# Altium PCB PCB1.PcbDoc
Units mil, origin at the board's own origin, x right, y up, seen from the top; angles counter-clockwise.
Board outline 2190 x 1760 mil, 2 copper layers (Top Layer, Bottom Layer); 13 components, 6 nets, 30 pads, 0 vias.
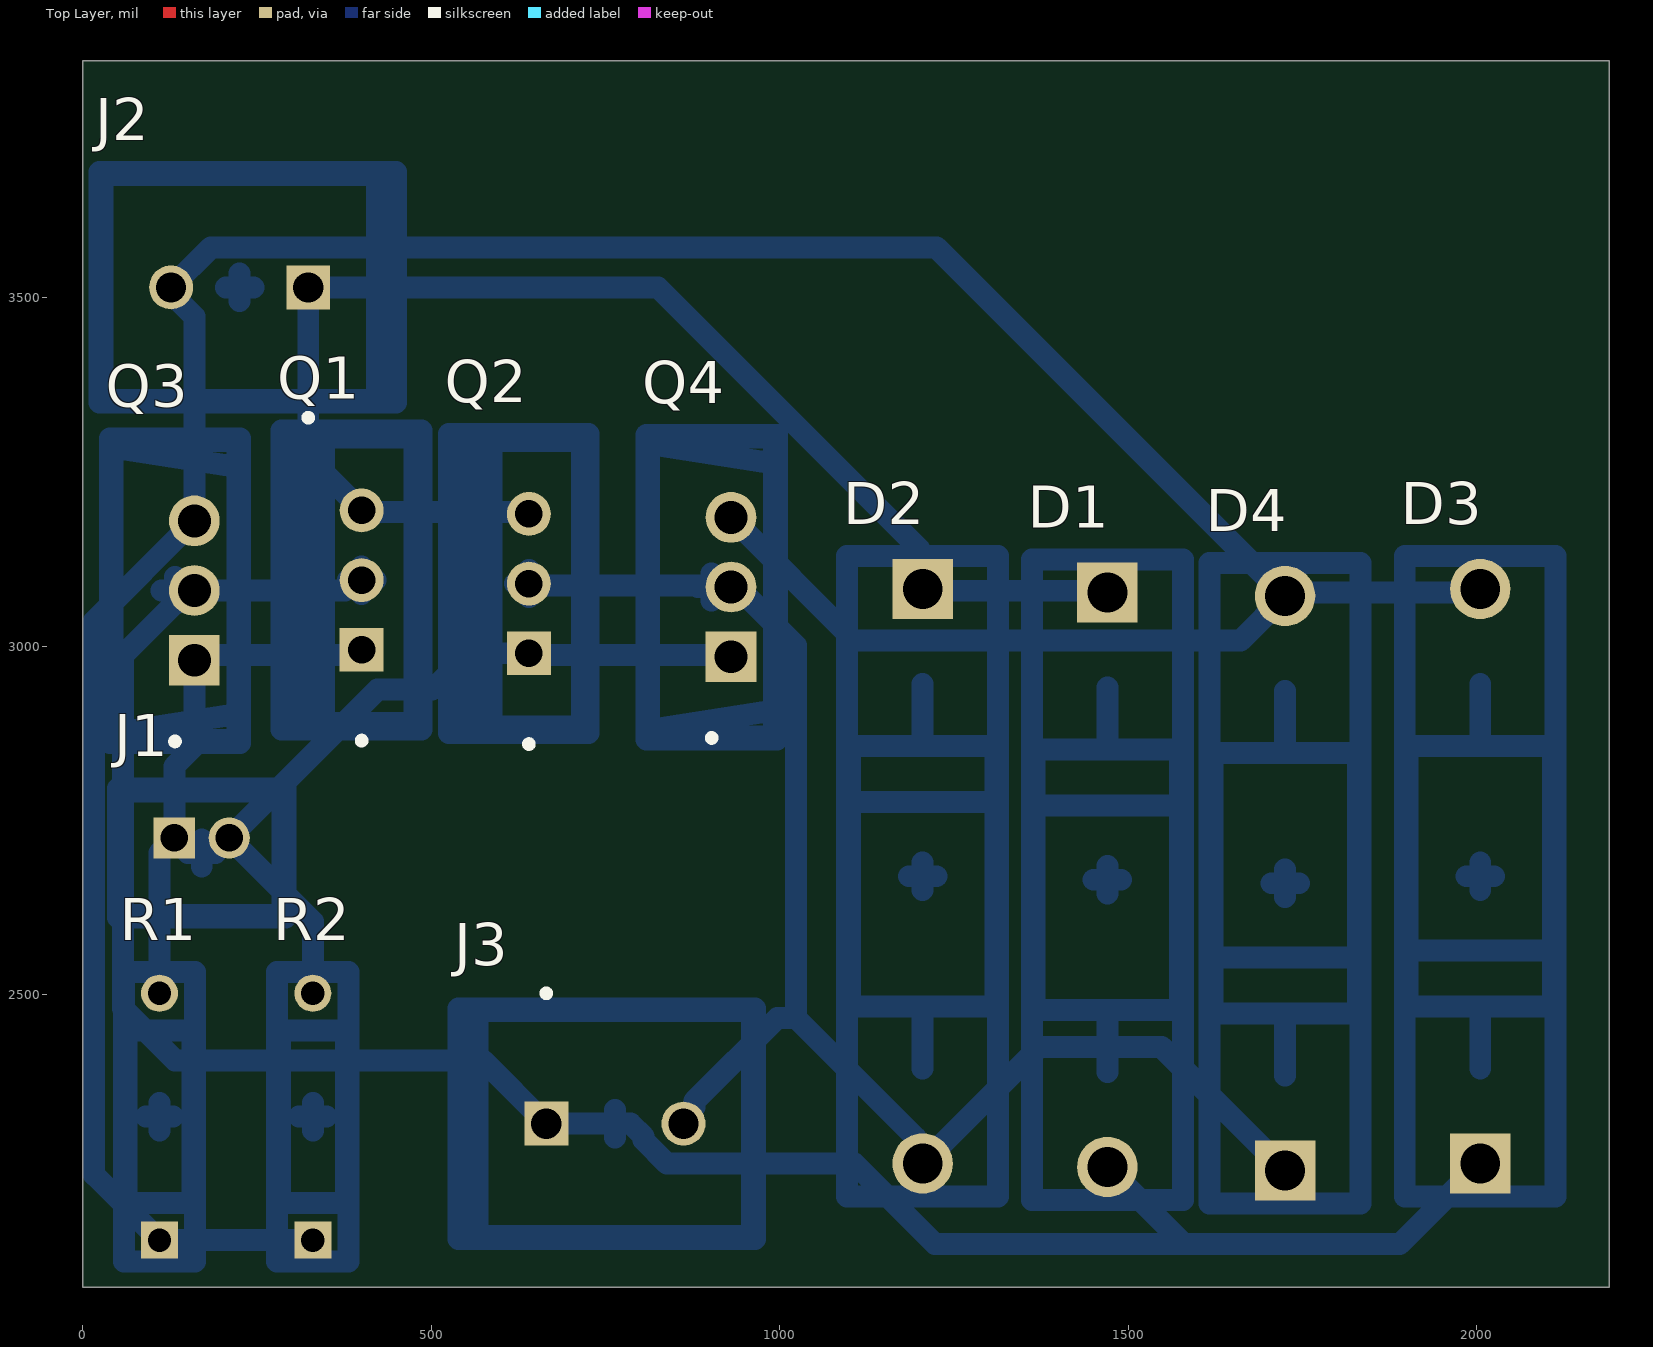
[diagram p0: Top Layer view]
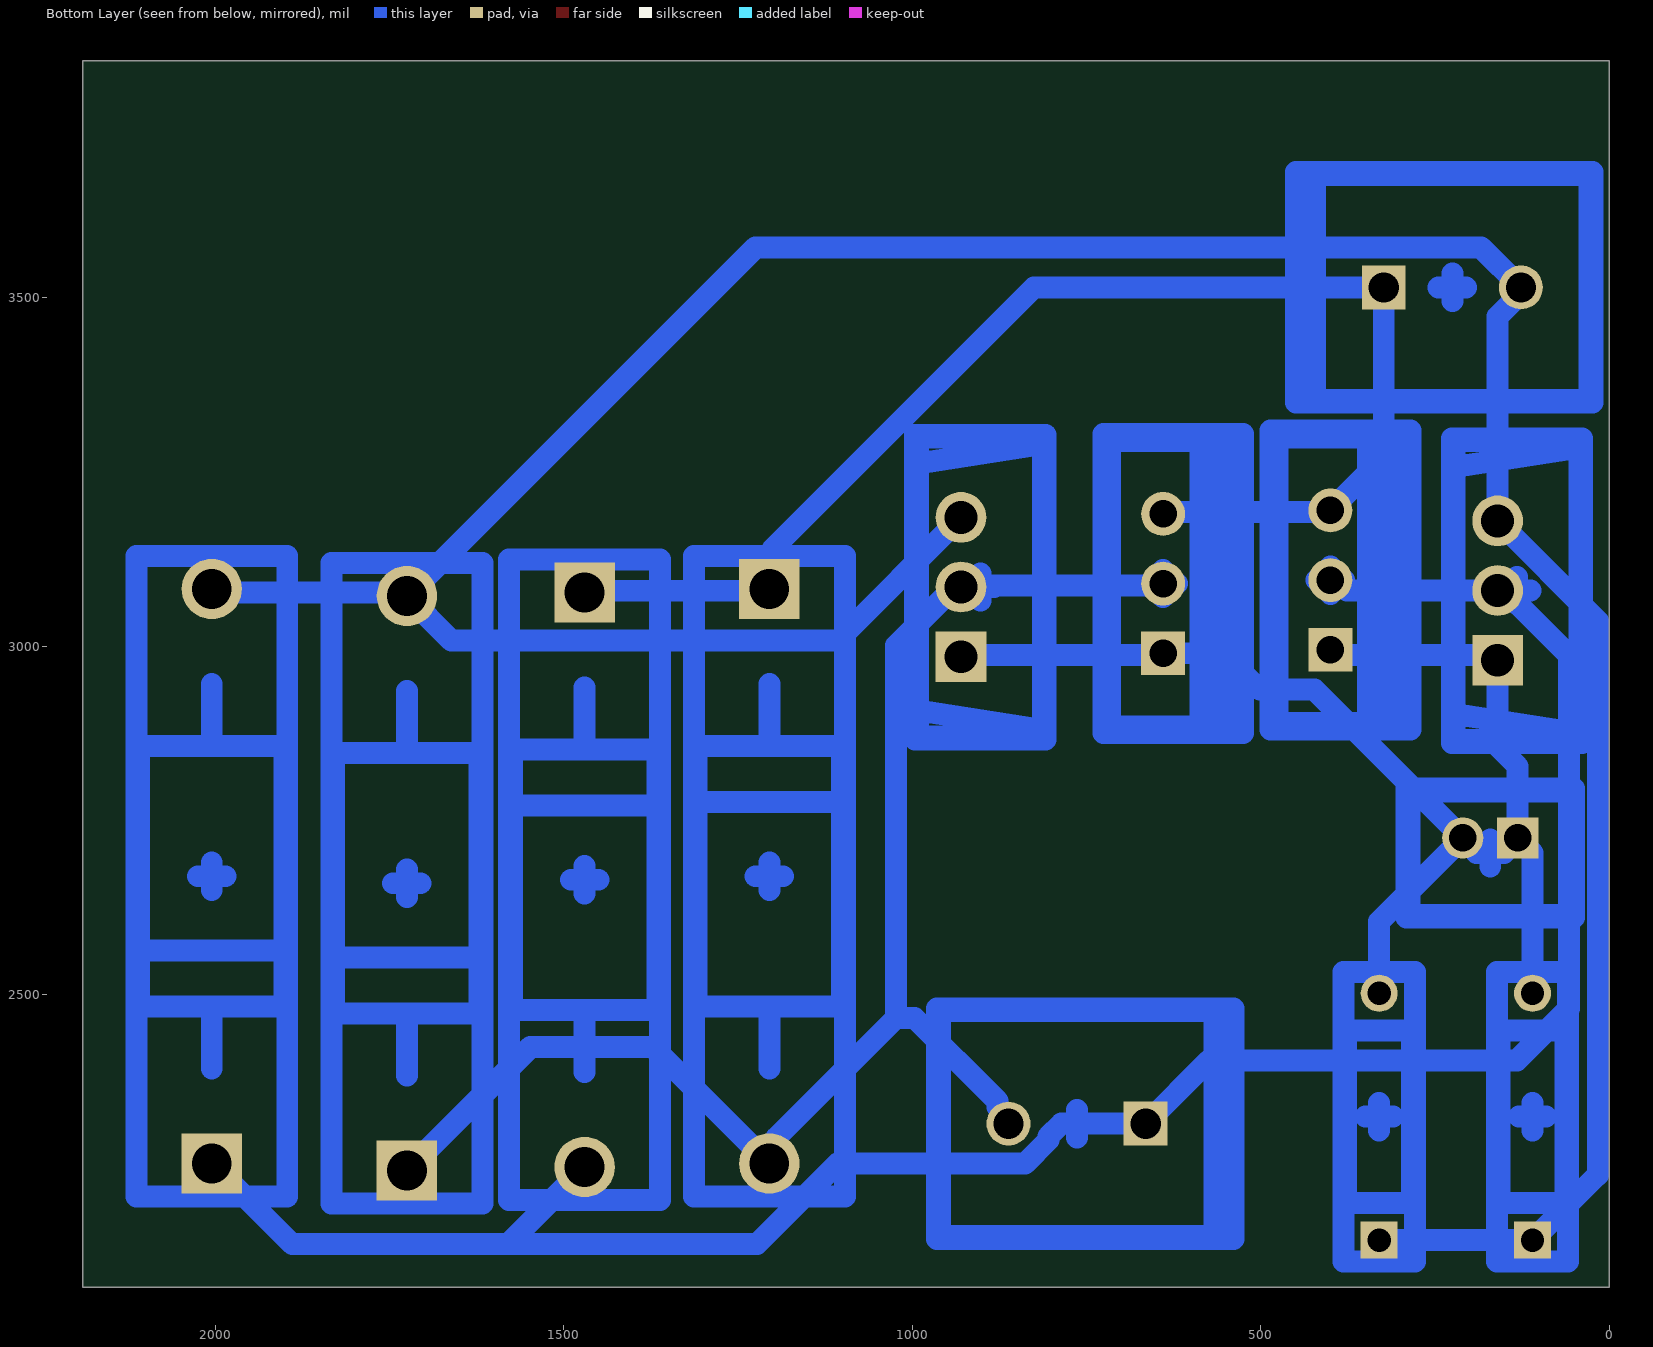
[diagram p1: Bottom Layer view, seen from below]
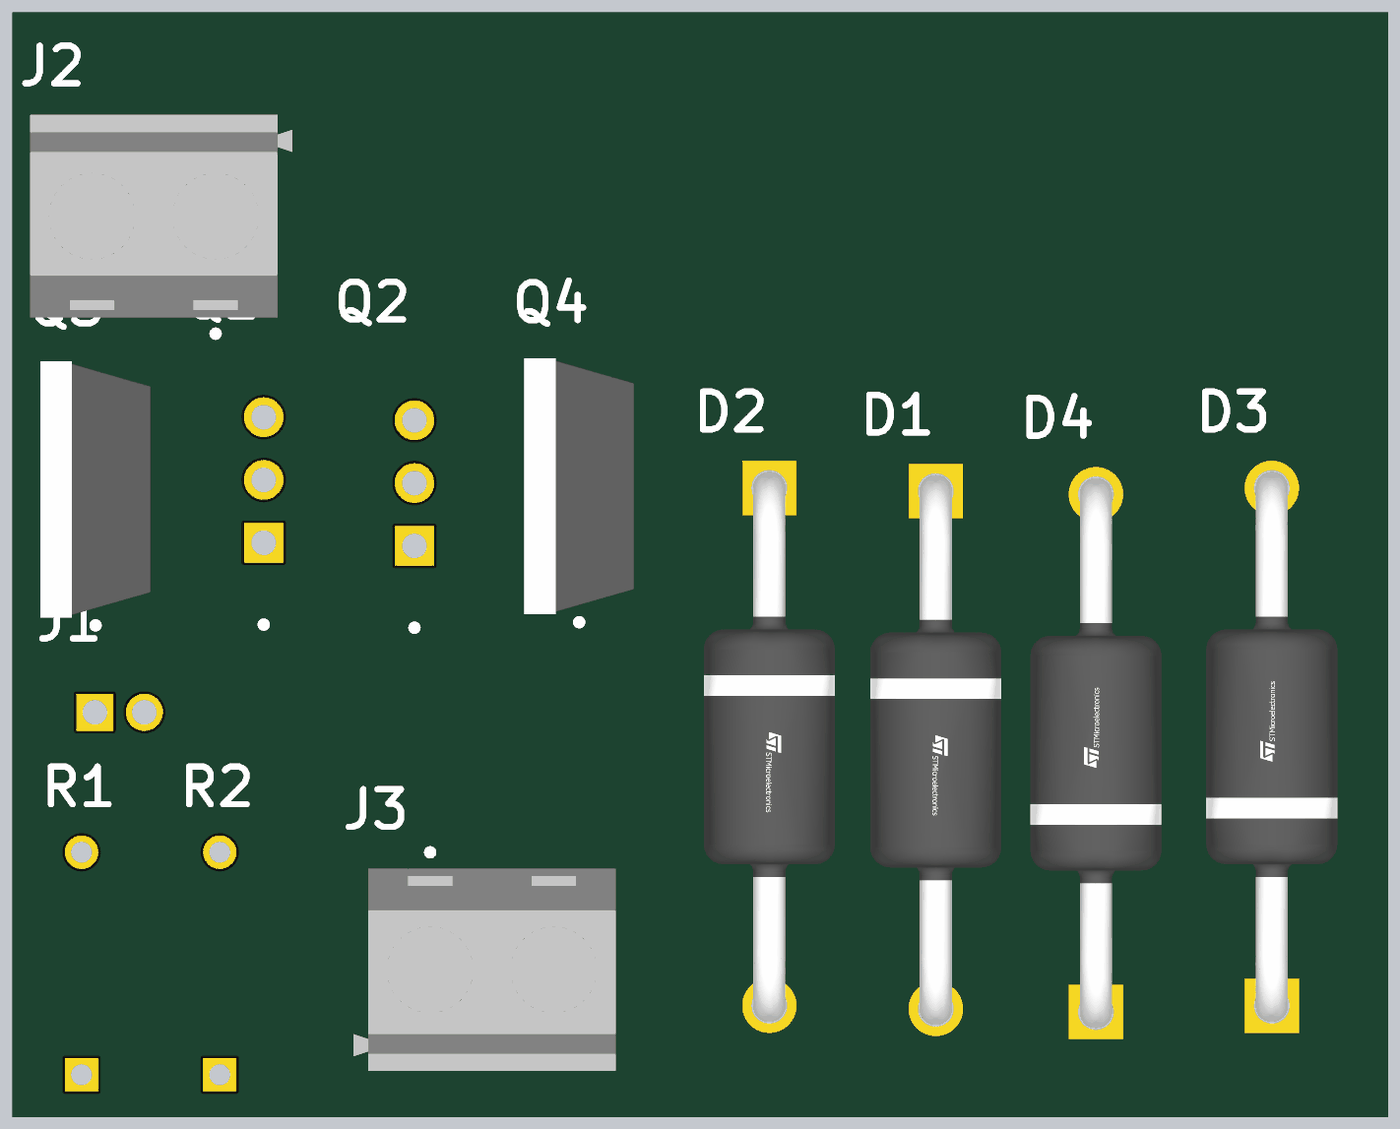
[diagram p2: 3D render of the assembled board from above, using the file's embedded part models]

## Layer stack, top to bottom
Top Solder: solder mask 0.4, Solder Resist, Dk 3.5
Top Layer: signal copper 1.4
Dielectric 1: dielectric 12.6, FR-4, Dk 4.8
Bottom Layer: signal copper 1.4
Bottom Solder: solder mask 0.4, Solder Resist, Dk 3.5

## Board outline
0,2080 2190,2080 2190,3840 0,3840

## Design rules (kind name [scope] priority, off if disabled: settings)
Clearance [All] p1: gap=10 ignorepadtopadclearanceinfootprint=FALSE
PolygonConnect [All] p1: connectstyle=Relief reliefconductorwidth=10 reliefentries=4 polygonreliefangle="90 Angle" airgapwidth=10
RoutingVias [All] p1: holewidth=28 width=50 viastyle="Through Hole" minholewidth=28 minwidth=50 maxholewidth=28 maxwidth=50
SolderMaskExpansion [All] p1: expansion=4 istentingtop=FALSE
SupplyNets "Schematic Supply Nets" [InNet('GND')] p1: voltage=0.000
Width [All] p1: maxlimit=31.5 minlimit=31.5 preferedwidth=31.5 minimp=50.000000 maximp=50.000000 favimp=50.000000 checkconnectedcopper=TRUE
30 further rules are at their usual default settings.

## Classes and differential pairs
component class Sheet1: D1 D2 D3 J1 J2 Q1 Q2 Q3 Q4 R1 R2

## Components (designator, comment, footprint, x,y, rotation, side; value= is the part's Value field where it differs from the comment)
D1 "1N5822" FP-DO-201AD-MFG 1470,2665 r270 top
D2 "1N5822" FP-DO-201AD-MFG 1205,2670 r270 top
D3 "1N5822" FP-DO-201AD-MFG 2005,2670 r90 top
D4 "1N5822" FP-DO-201AD-MFG 1725,2660 r90 top
J1 "B2B-PH-K-S(LF)(SN)" JST-B2B-PH-K-S_V 170.63,2703.35 r0 top
J2 "282836-2" TECO-282836-2_V 225,3515 r180 top
J3 "282836-2" TECO-282836-2_V 763.43,2315 r0 top
Q1 "SPP80P06P H" INF-PG-TO220-3-1_A_V 400,3095 r180 top
Q2 "SPP80P06P H" INF-PG-TO220-3-1_A_V 640,3090 r180 top
Q3 "IRLZ44NPbF" FP-PG-TO220-3-MFG 132.24,3080 r180 top
Q4 "IRLZ44NPbF" FP-PG-TO220-3-MFG 902.24,3085 r180 top
R1 "MFR-25FBF5210K" RESA60-630X240 110,2325 r90 top
R2 "MFR-25FBF5210K" RESA60-630X240 330,2325 r90 top

## Footprints (in the part's own frame and the unit in brackets; to place one, negate y for a bottom-side part, rotate by r counter-clockwise, add the part's x,y. Pads: shape width x height; smd on the part's side, far side on the other; paste and mask are expansions set on the pad)
FP-DO-201AD-MFG [mm]
  rect 2.2x2.2 hole 1.45 paste-2539.97 mask+0: 1(-10.47,0)
  round 2.2 hole 1.45 paste-2539.97 mask+0: 2(10.47,0)
  Bottom Layer lines w0.8: -2.7,-2.5 -2.7,2.5 ; 0,-0.5 0,0.5 ; 7,0 4.75,0 ; 0.5,0 -0.5,0 ; -4.75,0 -7,0 ; 11.67,-2.75 11.67,2.75 ; 11.67,-2.75 -11.67,-2.75 ; 11.67,-2.75 11.67,2.75 ; 11.67,-2.75 -11.67,-2.75 ; -11.67,-2.75 -11.67,2.75 ; -11.67,-2.75 -11.67,2.75 ; 4.75,-2.65 4.75,2.65 ; 4.75,-2.65 -4.75,-2.65 ; 4.75,-2.65 4.75,2.65 ; 4.75,-2.65 -4.75,-2.65 ; -4.75,-2.65 -4.75,2.65 ; -4.75,-2.65 -4.75,2.65 ; 4.75,2.65 -4.75,2.65 ; 4.75,2.65 -4.75,2.65 ; 11.67,2.75 -11.67,2.75 ; 11.67,2.75 -11.67,2.75
  body extent -11.67,-2.75 11.67,2.75, height 0.25
FP-PG-TO220-3-MFG [mm]
  rect 1.85x1.85 hole 1.2 paste-2539.97 mask+0: 1(-0.705,2.54)
  round 1.85 hole 1.2 paste-2539.97 mask+0: 2(-0.705,0) 3(-0.705,-2.54)
  Bottom Layer lines w0.8: 0.5,0 -0.5,0 ; 0,0.5 0,-0.5 ; 2.375,5.55 -2.375,5.55 ; 2.375,5.55 2.375,-5.55 ; 2.375,5.55 -2.375,5.55 ; 2.375,5.55 2.375,-5.55 ; 2.375,-5.55 -2.375,-5.55 ; 2.375,-5.55 -2.375,-5.55 ; -2.375,5.55 -2.375,-5.55 ; -2.375,5.55 -2.375,-5.55 ; 2.275,5.45 2.275,-5.45 -2.275,-5.45 -2.275,5.45 2.275,5.45 ; 2.275,5.2 2.275,-5.2 -2.275,-4.5 -2.275,4.5 2.275,5.2
  silkscreen extent -0.13,5.38 0.12,5.62, body extent -2.37,-5.55 2.37,5.55, height 0.25
INF-PG-TO220-3-1_A_V [mm] "FM, 3-Leads, Body 10.03x8.98mm, Pitch 2.54mm"
  rect 1.6x1.6 hole 1: 1(0,2.54)
  round 1.6 hole 1: 2(0,0) 3(0,-2.54)
  Bottom Layer lines w0.8: 2.17,5.2 2.17,-5.2 ; 1.37,5.2 1.37,-5.2 ; 0.5,0 -0.5,0 ; 0,0.5 0,-0.5 ; 2.67,5.2 -1.93,5.2 ; 2.67,5.2 2.67,-5.2 ; 2.67,5.2 2.67,-5.2 ; 2.67,5.2 -1.93,5.2 ; 2.67,-5.2 -1.93,-5.2 ; 2.67,-5.2 -1.93,-5.2 ; -1.93,5.2 -1.93,-5.2 ; -1.93,5.2 -1.93,-5.2 ; 2.92,5.45 2.92,-5.45 -2.18,-5.45 -2.18,5.45 2.92,5.45
  silkscreen extent -0.13,5.73 0.12,5.97, body extent -1.93,-5.2 2.67,5.2, height 20.75
JST-B2B-PH-K-S_V [mm] "Connector, 2-Leads, Body 5.9x4.5mm, Pitch 2mm"
  rect 1.5x1.5 hole 1: 1(-1,0.55)
  round 1.5 hole 1: 2(1,0.55)
  Bottom Layer lines w0.8: -0.5,0 0.5,0 ; 0,-0.5 0,0.5 ; -2.95,-2.25 -2.95,2.25 ; -2.95,-2.25 2.95,-2.25 ; -2.95,-2.25 2.95,-2.25 ; -2.95,-2.25 -2.95,2.25 ; -2.95,2.25 2.95,2.25 ; -2.95,2.25 2.95,2.25 ; 2.95,-2.25 2.95,2.25 ; 2.95,-2.25 2.95,2.25 ; -3.05,-2.35 3.05,-2.35 3.05,2.35 -3.05,2.35 -3.05,-2.35
  body extent -2.95,-2.25 2.95,2.25, height 6
RESA60-630X240 [mm] "Axial Resistor, 2-Leads, Dia 2.4mm, Body Length 6.3mm"
  rect 1.35x1.35 hole 0.85: 1(-4.5,0)
  round 1.35 hole 0.85: 2(4.5,0)
  Bottom Layer lines w0.8: 0,0.5 0,-0.5 ; -0.5,0 0.5,0 ; -3.15,1.2 3.15,1.2 ; -3.15,1.2 -3.15,-1.2 ; -3.15,1.2 -3.15,-1.2 ; -3.15,1.2 3.15,1.2 ; 3.15,1.2 3.15,-1.2 ; 3.15,1.2 3.15,-1.2 ; -3.15,-1.2 3.15,-1.2 ; -3.15,-1.2 3.15,-1.2 ; -5.275,1.3 5.275,1.3 5.275,-1.3 -5.275,-1.3 -5.275,1.3
  body extent -3.15,-1.2 3.15,1.2, height 2.4
TECO-282836-2_V [mm] "Female Header, Pitch 5mm, 1 x 2 Position, Height 10mm"
  rect 1.6x1.6 hole 1.1: 1(-2.5,0)
  round 1.6 hole 1.1: 2(2.5,0)
  Bottom Layer lines w0.8: 0.5,0 -0.5,0 ; 0,0.5 0,-0.5 ; 5,4.1 -5.6,4.1 -5.6,-4.1 5,-4.1 ; 5,4.1 5,-4.1 ; 5,4.1 -5,4.1 -5,-4.1 5,-4.1 ; 5,4.1 5,-4.1 ; 5.1,4.2 5.1,-4.2 -5.7,-4.2 -5.7,4.2 5.1,4.2
  silkscreen extent -2.63,4.63 -2.38,4.87, body extent -5.6,-4.1 5,4.1, height 10

## Part data
D1 D2 D3 D4: library part CMP-12187-000025-1, "DIODE SCHOTTKY 40V 3A DO201AD", Forward Current=3A, Manufacturer=STMicroelectronics, Max Junction Temp=+150°C, Max Repetitive Reverse Voltage=40V, Max Surge Forward Current=80A, Package=DO-201AD, Peak Reverse Current=2mA, Temperature="to +150°C", Automotive=No, Category=Diode, ComponentLink2Description=Datasheet, ComponentLink2URL=https://www.st.com/resource/en/datasheet/1n5822.pdf, Device Class L1="Discrete Semiconductors", Device Class L2=Diodes, Device Class L3="Schottky Diodes", Digikey Description="DIODE SCHOTTKY 40V 3A DO201AD", Height=5.3mm, Lead Free=Yes, Manufacturer Part Number=1N5822, Mouser Description="Schottky Diodes & Rectifiers Vr/40V Io/3A BULK", Octopart=https://octopart.com/1n5822-stmicroelectronics-323225, RoHS=TRUE, Temperature Range High=+150°C
J1: library part CMP-2000-05162-1, "Male Header, Pitch 2 mm, 1 x 2 Position, Height 6 mm, Tail Length 3.4 mm, -25 to 85 degC, RoHS, Bulk", Manufacturer=JST, Datasheet URL=http://datasheet.octopart.com/B2B-PH-K-S%28LF%29%28SN%29-JST-datasheet-8324864.pdf, Datasheet Version=Nov-08, Manufacturer URL=http://www.jst.com/home2.html, No of Positions=2, Pitch=2mm, Style/Orientation=StraightHeader/Plug, Termination=Crimp, Type=ShroudedHeader
J2 J3: library part CMP-1684-00017-1, "Female Header, Pitch 5 mm, 1 x 2 Position, Height 10 mm, Tail Length 3.5 mm, Rohs, Bulk", Color=Green, Current=13.5A, Manufacturer="TE Connectivity", Package Description="Female Header, Pitch 5 mm, 1 x 2 Position, Height 10 mm, Tail Length 3.5 mm", Package Reference=THD, Standard Package=300, Voltage=300V, 3D Model=282836-2.pdf, Category=Connectors,Interconnects, Clamp Material - Plating=Brass-NickelPlated, Contact Material - Plating=Brass-TinPlated, Datasheet URL=http://www.te.com.cn/commerce/DocumentDelivery/DDEController?Action=showdoc&DocId=Catalog+Section%7F1308389_EUROSTYLE_TERMINAL_BLOCKS%7F0607%7Fpdf%7FEnglish%7FENG_CS_1308389_EUROSTYLE_TERMINAL_BLOCKS_0607.pdf%7F282836-2, Dynamic Catalog=BuchananSeries, Family=TerminalBlocks-WiretoBoard, Featured Product=EurostyleTerminalBlockConnectors, Features=Interlocking(Side), Housing Material=Polyamide(PA66),Nylon6/6, Manufacturer URL=http://www.te.com, Mating Orientation=HorizontalwithBoard, Mounting Type=ThroughHole, Number of Levels=1, Other Names="5ULV-02B / A98076", Packaging=Bulk, Pitch="0.197\"(5.00mm)", Positions Per Level=2, Product Training Modules=Wire-to-BoardEurostyleTerminalBlocks, RoHS Information=282836-2StatementofCompliance, Screw Material - Plating=Brass-NickelPlated, Screw Thread=M3, Series=Buchanan, Torque - Screw=0.68Nm(6Lb-In), Wire Gauge=16-30AWG, Wire Termination=Screw-RisingCageClamp
Q1 Q2: library part CMP-1099-00045-1, "P-Channel SIPMOS Power-Transistor, -60 V VDS, -80 A ID, -55 to 175 degC, PG-TO220-3-1, Tube, Green", Manufacturer=Infineon, ComponentLink1Description="Manufacturer URL", ComponentLink1URL=http://www.infineon.com/, ComponentLink2Description=Datasheet, ComponentLink2URL=http://www.infineon.com/dgdl/SPP80P06P+H_Rev1.5.pdf?folderId=db3a3043156fd5730115d6a107c41454&fileId=db3a304325afd6e001264bbdf4a70ca7, ComponentLink3Description="Package Specification", ComponentLink3URL=http://www.infineon.com/dgdl/IPP028N08N3_Rev1%5B1%5D.0.pdf?folderId=db3a304313b8b5a60113cee8763b02d7&fileId=db3a30432313ff5e0123a3c08e7326b5, DatasheetVersion="Rev. 1.5", Green=TRUE, Halogen-free=TRUE, ID (max)="-80Â A", IDpuls (max)="-320Â A", Mounting Technology="Through Hole", PackageDescription="3-Pin Plastic (Green) Transistor Single Outline Package, 10.03 x 8.98 mm Body, 2.54 mm Pitch", PackageReference=PG-TO220-3-1, PackageVersion="Rev. 05, 08/2007", Packing=Tube, PartNumber="SPP80P06P H", Pto t (max)="340Â W", QG="115Â nC", RDS (on) (max)="23Â mOhm", Rth="0.4Â K/W", RthJC (max)="0.4Â K/W", VDS (max)="-60Â V", VGS(th) (max)="-4Â V", VGS(th) (min)="-2.1Â V"
Q3 Q4: library part CMP-32901-000488-1, "MOSFET N-CH 55V 47A TO220AB", Case/Package=TO-220, Continuous Drain Current (ID)=47A, Drain to Source Breakdown Voltage=55V, Drain to Source Resistance=35mR, Gate to Source Voltage (Vgs)=16V, Input Capacitance=1.7nF, Max Operating Temperature=175°C, Max Power Dissipation=110W, Min Operating Temperature=-55°C, Threshold Voltage=2V, Drain to Source Voltage (Vdss)=55V, Element Configuration=Single, Halogen Free="Halogen Free", Height=0.6inch, Lead Free="Lead Free", Length=0.414inch, Max Dual Supply Voltage=55V, Mount="Through Hole", Number of Pins=3, Packaging=Rail/Tube, Power Dissipation=110W, Rds On Max=22mR, REACH SVHC="No SVHC", RoHS Compliant=Yes, Turn-Off Delay Time=26ns, Turn-On Delay Time=11ns, Width=0.185inch
R1 R2: library part CMP-1659-00074-2, "Axial Resistor, 10 KOhm, +/- 1%, 0.25 W, -55 to 155 degC, 2-Pin THD, RoHS, Bulk", Case\/Package=Axial, Manufacturer=Yageo, Max Operating Temperature=155degC, Max Power Dissipation=250mW, Min Operating Temperature=-55degC, Package Description="2-Pin Axial Lead, Dia 2.4 mm, Body Length 6.3 mm", Package Quantity=200, Package Reference=MFR-25, Resistance=10KOhm, Temperature Coefficient=100ppm\/degreesC, Tolerance=1%, Voltage Rating=250V, Voltage Rating (DC)=200V, Composition=MetalFilm, Datasheet URL=http://www.yageo.com/documents/recent/Yageo%20LR_MFR_2013.pdf, Datasheet Version=04/2013, Lead Free=LeadFree, Length=0.248inch, Manufacturer URL=http://www.yageo.com/, Military Standard=Not, Mount=ThroughHole, Mounting Technology=ThroughHole, Number of Terminations=2, Packaging=Bulk, Power Rating=250mW, RoHSCompliant=True, Termination=Axial

## Nets (pads, with @x,y where several pads share a name; then routed paths per layer and width w, separated by ;. In a path a pad name is that pad's centre, name@x,y a point inside that pad or via, vN(x,y) a via of type N, cw(c..) or ccw(c..) an arc to the next point about the centre after c; other vN are vias at no path point)
+12V: D1.1 D2.1 J2.1 Q1.3 Q2.3 | length 1952.6
  Bottom Layer w31.5: Q2.3 637.5,3192.5 402.5,3192.5 Q1.3 323.42,3271.58 J2.1 825,3515 1200,3140 1200,3087.2 D2.1 1207.5,3079.7 1467.5,3079.7 D1.1
"+ve motor": D1.2 D3.1 J3.1 Q1.2 Q3.2 | length 3200
  Bottom Layer w31.5: Q1.2 391.48,3095 376.48,3080 Q3.2 150.75,3080 57.68,2986.93 57.68,2480.49 132.55,2405.62 574.38,2405.62 J3.1 786.16,2315 804.61,2296.55 804.61,2291.29 838.14,2257.76 1107.38,2257.76 1222.89,2142.24 1577.4,2142.24 ; D1.2@1480.55,2263.34 D1.2 1580.55,2142.24 1889.45,2142.24 1977.44,2230.24 D3.1
"-ve motor": D2.2 D4.1 J3.2 Q2.2 Q4.2 | length 2149.4
  Bottom Layer w31.5: Q2.2 642.5,3087.5 927.5,3087.5 Q4.2 939.25,3085 1023.05,3001.2 1023.05,2466.95 ; J3.2 861.85,2323.52 877.6,2339.27 877.6,2347.6 996.95,2466.95 1023.05,2466.95 ; D2.2 1372.2,2425 1547.8,2425 D4.1 ; D2.2@1215,2247.8 1194.45,2268.34 1194.45,2295.55 1023.05,2466.95
GND: D3.2 D4.2 J2.2 Q3.3 Q4.3 R1.1 R2.1 | length 4707.6
  Bottom Layer w31.5: R2.1 R1.1 16.18,2241.65 16.18,3036.18 Q3.3 160,3473.05 126.57,3506.48 J2.2 183.82,3572.24 1224.96,3572.24 D4.2 ; Q4.3 1106.85,3008.15 1660.94,3008.15 D4.2 ; D3.2 2000,3077.2 1730,3077.2 D4.2
"MCU 1": J1.1 Q1.1 Q3.1 R1.2 | length 744.8
  Bottom Layer w31.5: R1.2 110,2703.74 J1.1 131.26,2827.8 160,2856.54 Q3.1 167.5,2987.5 392.5,2987.5 Q1.1
"MCU 2": J1.2 Q2.1 Q4.1 R2.2 | length 1104.4
  Bottom Layer w31.5: R2.2 330,2605 J1.2 422.76,2937.76 501.11,2937.76 553.35,2990 Q2.1 642.5,2987.5 927.5,2987.5 Q4.1